# Altium PCB ISA8_Ethernet.PcbDoc (part 1 of 2)
Units mm, origin at the board's own origin, x right, y up, seen from the top; angles counter-clockwise.
Board outline 104.14 x 74.93 mm, 2 copper layers (Front, Back); 34 components, 134 nets, 366 pads, 95 vias.
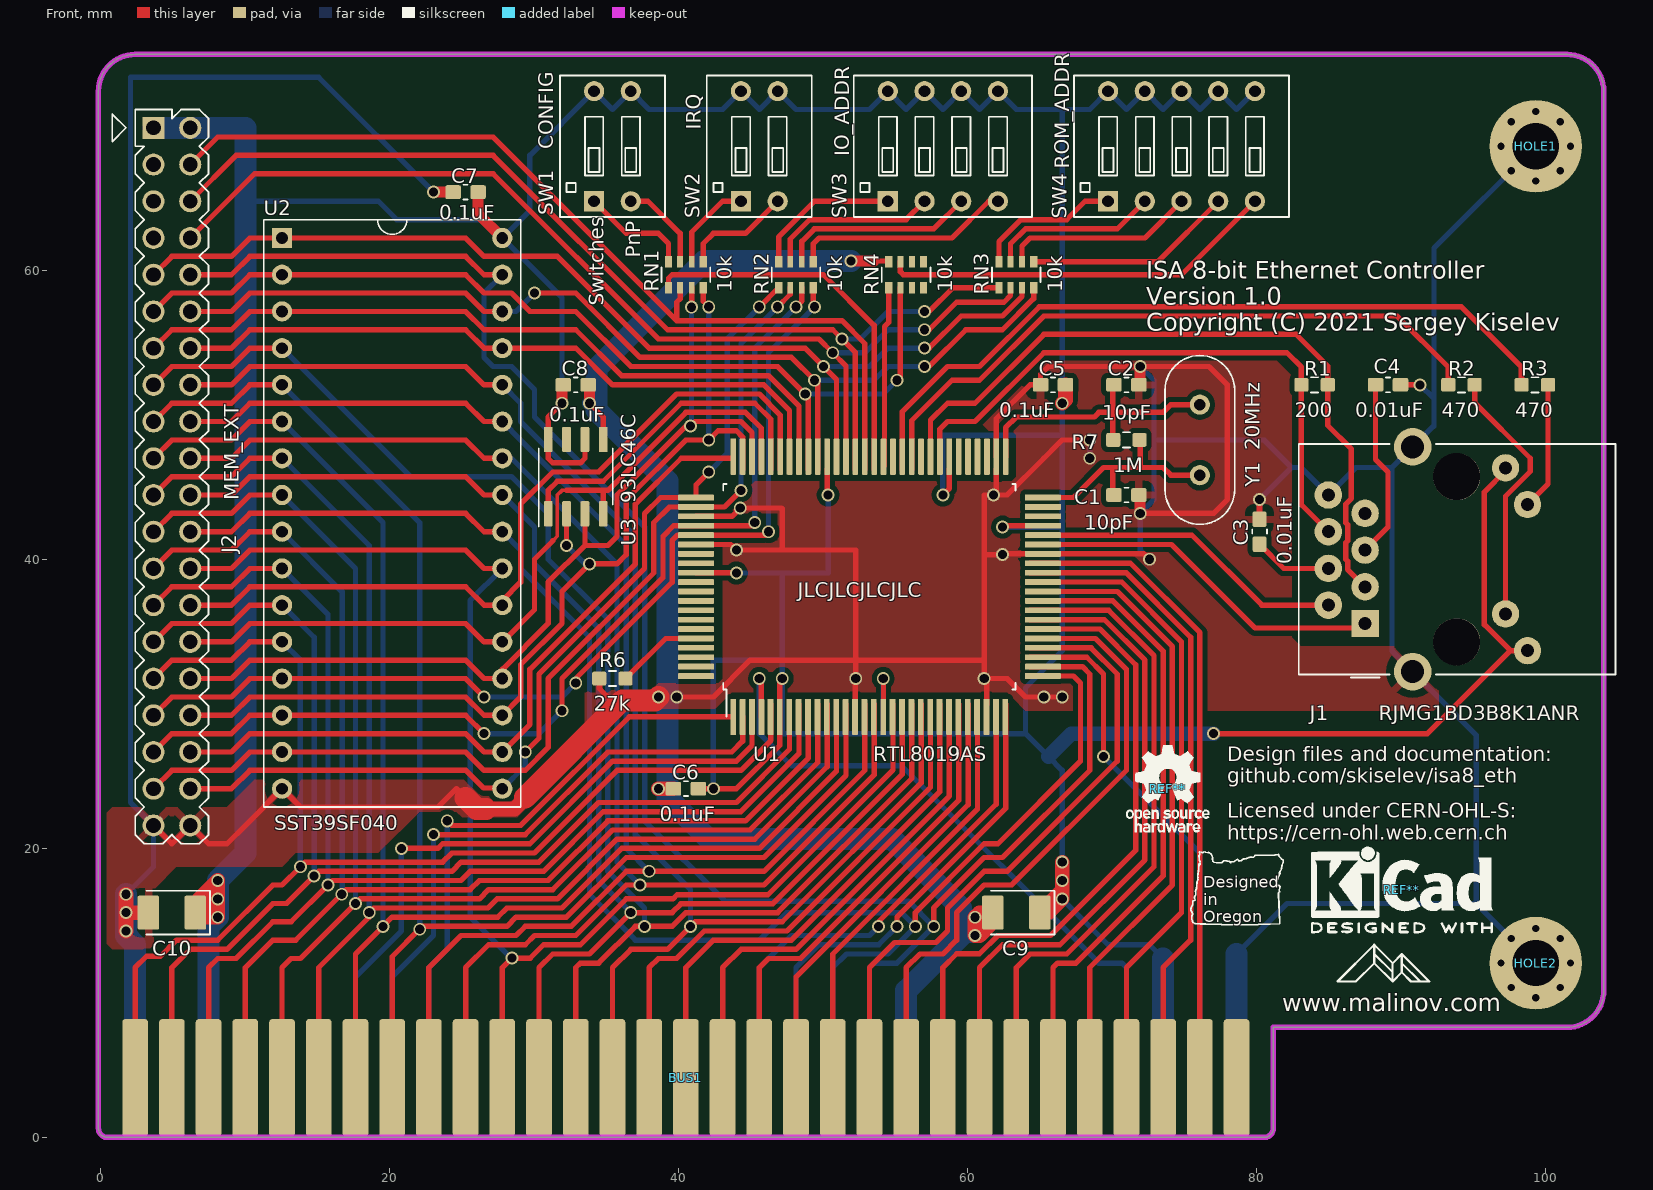
[diagram p0: Front view]
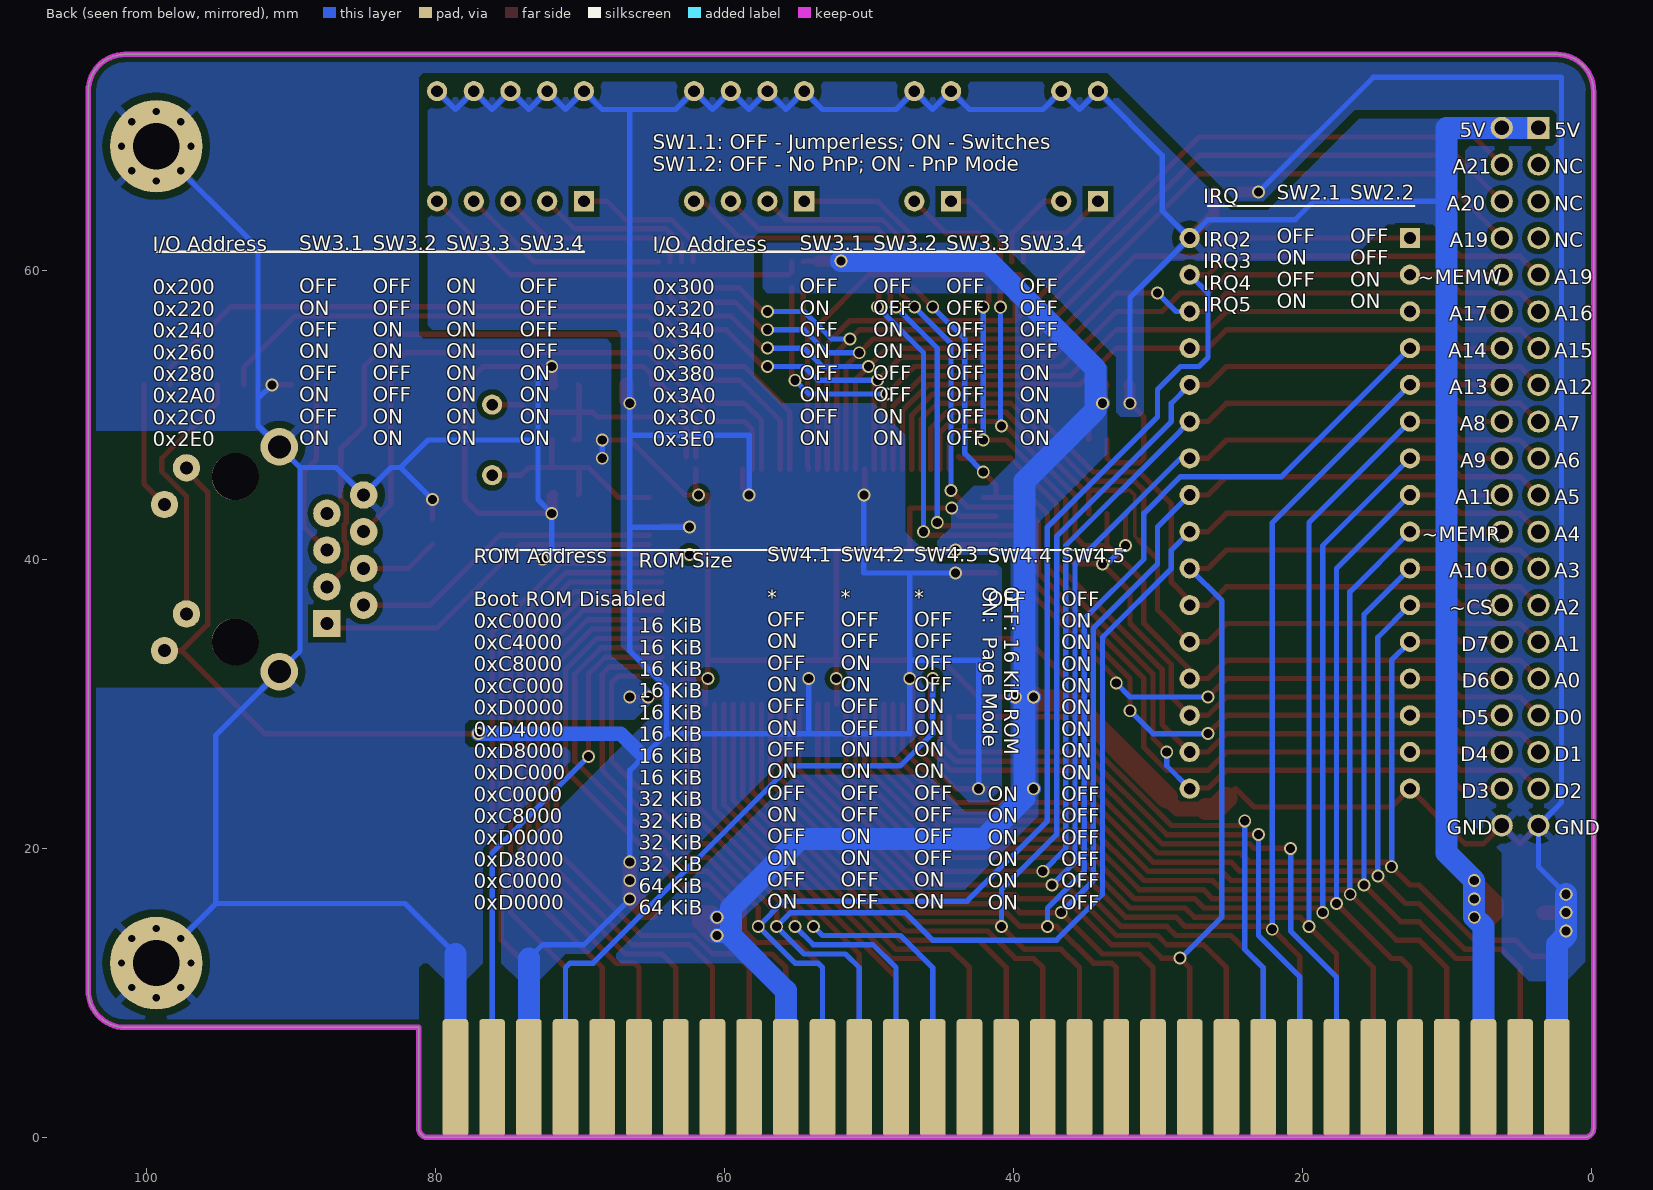
[diagram p1: Back view, seen from below]

## Layer stack, top to bottom
F.Mask: solder mask 0.0102, Solder Resist, Dk 3.5
Front: signal copper 0.0356
Dielectric 1: dielectric 0.32, FR-4, Dk 4.8
Back: signal copper 0.0356
B.Mask: solder mask 0.0102, Solder Resist, Dk 3.5

## Board outline
-0.127,0.635 -0.127,72.39 cw(c2.413,72.39) 2.413,74.93 101.473,74.93 cw(c101.473,72.39) 104.013,72.39 104.013,10.16 cw(c101.473,10.16) 101.473,7.62 81.153,7.62 81.153,0.635 cw(c80.518,0.635) 80.518,0 0.508,0 cw(c0.508,0.635) -0.127,0.635

## Design rules (kind name [scope] priority, off if disabled: settings)
Clearance "Clearence 0.3556_Polygon" [InNamedPolygon('Back-GND') OR InNamedPolygon('Front-GND') OR InNamedPolygon('Back-GND-1') OR InNamedPolygon('Back-VCC') OR InNamedPolygon('Front-GND-1')] p1: gap=0.356 ignorepadtopadclearanceinfootprint=FALSE
Clearance "Clearence 0.254_NetClass" [InNetClass('Power')] p2: gap=0.254 ignorepadtopadclearanceinfootprint=FALSE
Clearance "Clearence 0.2_NetClass" [InNetClass('Default')] p3: gap=0.2 ignorepadtopadclearanceinfootprint=FALSE
HoleSize "Hole Size (Default)" [All] p1: absolutevalues=TRUE maxlimit=10 minlimit=0 maxpercent=80.000 minpercent=20.000
MinimumSolderMaskSliver [All] p1: minsoldermaskwidth=0
PolygonConnect Polygon_Front-GND-1_ConnectDirect [IsNamedPolygon('Front-GND-1') vs IsVia] p1: connectstyle=Direct reliefconductorwidth=0.254 reliefentries=4 polygonreliefangle="90 Angle" airgapwidth=0.254
PolygonConnect Polygon_Front-GND-1_ConnectRelief45 [IsNamedPolygon('Front-GND-1') vs (IsThruPin or IsSMTPin) and (PadShape_AllLayers = 'Round')] p2: connectstyle=Relief reliefconductorwidth=0.508 reliefentries=4 polygonreliefangle="45 Angle" airgapwidth=0.508
PolygonConnect Polygon_Front-GND-1_ConnectRelief90 [IsNamedPolygon('Front-GND-1') vs (IsThruPin or IsSMTPin) and (PadShape_AllLayers <> 'Round')] p3: connectstyle=Relief reliefconductorwidth=0.508 reliefentries=4 polygonreliefangle="90 Angle" airgapwidth=0.508
PolygonConnect Polygon_Back-VCC_ConnectDirect [IsNamedPolygon('Back-VCC') vs IsVia] p4: connectstyle=Direct reliefconductorwidth=0.254 reliefentries=4 polygonreliefangle="90 Angle" airgapwidth=0.254
PolygonConnect Polygon_Back-VCC_ConnectRelief45 [IsNamedPolygon('Back-VCC') vs (IsThruPin or IsSMTPin) and (PadShape_AllLayers = 'Round')] p5: connectstyle=Relief reliefconductorwidth=0.508 reliefentries=4 polygonreliefangle="45 Angle" airgapwidth=0.508
PolygonConnect Polygon_Back-VCC_ConnectRelief90 [IsNamedPolygon('Back-VCC') vs (IsThruPin or IsSMTPin) and (PadShape_AllLayers <> 'Round')] p6: connectstyle=Relief reliefconductorwidth=0.508 reliefentries=4 polygonreliefangle="90 Angle" airgapwidth=0.508
PolygonConnect Polygon_Back-GND-1_ConnectDirect [IsNamedPolygon('Back-GND-1') vs IsVia] p7: connectstyle=Direct reliefconductorwidth=0.254 reliefentries=4 polygonreliefangle="90 Angle" airgapwidth=0.254
PolygonConnect Polygon_Back-GND-1_ConnectRelief45 [IsNamedPolygon('Back-GND-1') vs (IsThruPin or IsSMTPin) and (PadShape_AllLayers = 'Round')] p8: connectstyle=Relief reliefconductorwidth=0.508 reliefentries=4 polygonreliefangle="45 Angle" airgapwidth=0.508
PolygonConnect Polygon_Back-GND-1_ConnectRelief90 [IsNamedPolygon('Back-GND-1') vs (IsThruPin or IsSMTPin) and (PadShape_AllLayers <> 'Round')] p9: connectstyle=Relief reliefconductorwidth=0.508 reliefentries=4 polygonreliefangle="90 Angle" airgapwidth=0.508
PolygonConnect Polygon_Front-GND_ConnectDirect [IsNamedPolygon('Front-GND') vs IsVia] p10: connectstyle=Direct reliefconductorwidth=0.254 reliefentries=4 polygonreliefangle="90 Angle" airgapwidth=0.254
PolygonConnect Polygon_Front-GND_ConnectRelief45 [IsNamedPolygon('Front-GND') vs (IsThruPin or IsSMTPin) and (PadShape_AllLayers = 'Round')] p11: connectstyle=Relief reliefconductorwidth=0.508 reliefentries=4 polygonreliefangle="45 Angle" airgapwidth=0.508
PolygonConnect Polygon_Front-GND_ConnectRelief90 [IsNamedPolygon('Front-GND') vs (IsThruPin or IsSMTPin) and (PadShape_AllLayers <> 'Round')] p12: connectstyle=Relief reliefconductorwidth=0.508 reliefentries=4 polygonreliefangle="90 Angle" airgapwidth=0.508
PolygonConnect Polygon_Back-GND_ConnectDirect [IsNamedPolygon('Back-GND') vs IsVia] p13: connectstyle=Direct reliefconductorwidth=0.254 reliefentries=4 polygonreliefangle="90 Angle" airgapwidth=0.254
PolygonConnect Polygon_Back-GND_ConnectRelief45 [IsNamedPolygon('Back-GND') vs (IsThruPin or IsSMTPin) and (PadShape_AllLayers = 'Round')] p14: connectstyle=Relief reliefconductorwidth=0.508 reliefentries=4 polygonreliefangle="45 Angle" airgapwidth=0.508
PolygonConnect Polygon_Back-GND_ConnectRelief90 [IsNamedPolygon('Back-GND') vs (IsThruPin or IsSMTPin) and (PadShape_AllLayers <> 'Round')] p15: connectstyle=Relief reliefconductorwidth=0.508 reliefentries=4 polygonreliefangle="90 Angle" airgapwidth=0.508
RoutingVias [All] p1: holewidth=0.711 width=1.27 viastyle="Through Hole" minholewidth=0.711 minwidth=1.27 maxholewidth=0.711 maxwidth=1.27
SilkToSilkClearance [All] p1: silktosilkclearance=0
SilkToSolderMaskClearance [IsPad] p1: minsilkscreentomaskgap=0 clearancetoexposedcopper=TRUE
SolderMaskExpansion [All] p1: expansion=0.102 istentingtop=FALSE
Width [All] p1: maxlimit=10 minlimit=0.203 preferedwidth=0.368 minimp=50.000000 maximp=50.000000 favimp=50.000000
26 further rules are at their usual default settings.

## Classes and differential pairs
net class Default: A0 A1 A2 A3 A4 A5 A6 A7 A8 A9 A10 A11 A12 A13 A14 A15 A16 A17 A18 A19 AEN AUI B\C\S\ BA14 BA15 BA16 BA17 BA18 BA19 BA20 BA21 BD0 BD1 BD2 BD3 BD4 BD5 BD6 BD7 D0 D1 D2 D3 D4 D5 D6 D7 EECS GND I\O\C\S\1\6\ I\O\R\ I\O\W\ IOCHRDY IRQ3 IRQ4 IRQ5 IRQ9 JP LED_CRS LED_LINK Net-(BUS1-Pad5) Net-(BUS1-Pad6) Net-(BUS1-Pad7) Net-(BUS1-Pad8) Net-(BUS1-Pad9) Net-(BUS1-Pad15) Net-(BUS1-Pad16) Net-(BUS1-Pad17) Net-(BUS1-Pad18) Net-(BUS1-Pad19) Net-(BUS1-Pad20) Net-(BUS1-Pad21) Net-(BUS1-Pad22) Net-(BUS1-Pad26) Net-(BUS1-Pad27) Net-(BUS1-Pad28) Net-(BUS1-Pad30) Net-(BUS1-Pad32) Net-(C1-Pad2) Net-(C2-Pad2) Net-(C3-Pad1) Net-(C4-Pad1) Net-(J1-PadL2) Net-(J1-PadL3) Net-(J1-PadR7) Net-(J2-Pad3) Net-(J2-Pad5) Net-(J2-Pad7) Net-(RN1-Pad5) Net-(RN1-Pad6) Net-(RN1-Pad7) Net-(RN1-Pad8) Net-(RN2-Pad5) Net-(RN2-Pad6) Net-(RN2-Pad7) Net-(RN2-Pad8) Net-(RN3-Pad5) Net-(RN3-Pad6) Net-(RN3-Pad7) Net-(RN3-Pad8) Net-(RN4-Pad3) Net-(RN4-Pad4) Net-(RN4-Pad5) Net-(RN4-Pad6) Net-(RN4-Pad7) Net-(U1-Pad48) Net-(U1-Pad49) Net-(U1-Pad53) Net-(U1-Pad54) Net-(U1-Pad55) Net-(U1-Pad56) Net-(U1-Pad60) Net-(U1-Pad63) Net-(U1-Pad87) Net-(U1-Pad88) Net-(U1-Pad90) Net-(U1-Pad91) Net-(U1-Pad92) Net-(U1-Pad93) Net-(U1-Pad94) Net-(U1-Pad95) Net-(U1-Pad97) Net-(U1-Pad98) Net-(U1-Pad99) Net-(U1-Pad100) Net-(U3-Pad7) RSTDRV S\M\E\M\R\ S\M\E\M\W\ TP_RX+ TP_RX- TP_TX+ TP_TX- VCC

## Components (designator, comment, footprint, x,y, rotation, side; value= is the part's Value field where it differs from the comment)
BUS1 "BUSPC_DEV" Conn_Edge_PCB_ISA8 40.513,4.127 r0 top
C1 "10pF" C_0603_1608Metric_Pad1.08x0.95mm_HandSolder 70.993,44.45 r180 top
C2 "10pF" C_0603_1608Metric_Pad1.08x0.95mm_HandSolder 70.993,52.07 r180 top
C3 "0.01uF" C_0603_1608Metric_Pad1.08x0.95mm_HandSolder 80.2,41.91 r90 top
C4 "0.01uF" C_0603_1608Metric_Pad1.08x0.95mm_HandSolder 89.09,52.07 r0 top
C5 "0.1uF" C_0603_1608Metric_Pad1.08x0.95mm_HandSolder 65.913,52.07 r180 top
C6 "0.1uF" C_0603_1608Metric_Pad1.08x0.95mm_HandSolder 40.513,24.13 r180 top
C7 "0.1uF" C_0603_1608Metric_Pad1.08x0.95mm_HandSolder 25.273,65.405 r180 top
C8 "0.1uF" C_0603_1608Metric_Pad1.08x0.95mm_HandSolder 32.893,52.07 r0 top
C9 "Comment" CP_EIA-3528-15_AVX-H_Pad1.50x2.35mm_HandSolder 63.373,15.557 r180 top
C10 "Comment" CP_EIA-3528-15_AVX-H_Pad1.50x2.35mm_HandSolder 4.953,15.557 r180 top
HOLE1 "Comment" MountingHole_3.2mm_M3_Pad_Via 99.314,68.58 r0 top
HOLE2 "Comment" MountingHole_3.2mm_M3_Pad_Via 99.314,12.065 r0 top
J1 "RJMG1BD3B8K1ANR" RJ45_Amphenol_RJMG1BD3B8K1ANR 87.503,35.56 r90 top
J2 "MEM_EXT" Conn_Pin_Header_20x2_2.54mm 4.953,45.72 r270 top
R1 "200" R_0603_1608Metric_Pad0.98x0.95mm_HandSolder 84.01,52.07 r180 top
R2 "470" R_0603_1608Metric_Pad0.98x0.95mm_HandSolder 94.17,52.07 r180 top
R3 "470" R_0603_1608Metric_Pad0.98x0.95mm_HandSolder 99.251,52.07 r180 top
R6 "27k" R_0603_1608Metric_Pad0.98x0.95mm_HandSolder 35.433,31.75 r0 top
R7 "1M" R_0603_1608Metric_Pad0.98x0.95mm_HandSolder 70.993,48.26 r180 top
REF** "Comment" KiCad-Logo2_5mm_SilkScreen 90.043,17.145 r0 top
REF** "Comment" OSHW-Logo_5.7x6mm_SilkScreen 73.85,24.13 r0 top
RN1 "10k" R_Array_Convex_4x0603 40.513,59.69 r90 top
RN2 "10k" R_Array_Convex_4x0603 48.133,59.69 r90 top
RN3 "10k" R_Array_Convex_4x0603 63.373,59.69 r90 top
RN4 "10k" R_Array_Convex_4x0603 55.753,59.69 r90 top
SW1 "CONFIG" Switch_DIP_2_Positions 35.433,68.58 r0 top
SW2 "IRQ" Switch_DIP_2_Positions 45.593,68.58 r0 top
SW3 "IO_ADDR" Switch_DIP_4_Positions 58.293,68.58 r0 top
SW4 "ROM_ADDR" Switch_DIP_5_Positions 74.803,68.58 r0 top
U1 "RTL8019AS" IC_PQFP-100_14x20mm_P0.65mm_Hand_Soldering 53.213,38.1 r90 top
U2 "SST39SF040" Socket_DIP32_600 20.193,43.18 r270 top
U3 "93LC46C" SO-8_3.9x4.9mm_P1.27mm 32.893,45.72 r90 top
Y1 "20MHz" Crystal_HC-49U_Vert 76.073,48.26 r90 top

## Footprints (in the part's own frame and the unit in brackets; to place one, negate y for a bottom-side part, rotate by r counter-clockwise, add the part's x,y. Pads: shape width x height; smd on the part's side, far side on the other; paste and mask are expansions set on the pad)
C_0603_1608Metric_Pad1.08x0.95mm_HandSolder [mm]
  rrect25% 1.075x0.95 smd mask+0: 1(-0.863,0) 2(0.863,0)
  silkscreen extent -0.15,-0.51 0.15,0.51
Conn_Edge_PCB_ISA8 [mil]
  rrect25% 70x320 smd far side paste-320 mask+0: 1(1500,0) 2(1400,0) 3(1300,0) 4(1200,0) 5(1100,0) 6(1000,0) 7(900,0) 8(800,0) 9(700,0) 10(600,0) 11(500,0) 12(400,0) 13(300,0) 14(200,0) 15(100,0) 16(0,0) 17(-100,0) 18(-200,0) 19(-300,0) 20(-400,0) 21(-500,0) 22(-600,0) 23(-700,0) 24(-800,0) 25(-900,0) 26(-1000,0) 27(-1100,0) 28(-1200,0) 29(-1300,0) 30(-1400,0) 31(-1500,0)
  rrect25% 70x320 smd paste-320 mask+0: 32(1500,0) 33(1400,0) 34(1300,0) 35(1200,0) 36(1100,0) 37(1000,0) 38(900,0) 39(800,0) 40(700,0) 41(600,0) 42(500,0) 43(400,0) 44(300,0) 45(200,0) 46(100,0) 47(0,0) 48(-100,0) 49(-200,0) 50(-300,0) 51(-400,0) 52(-500,0) 53(-600,0) 54(-700,0) 55(-800,0) 56(-900,0) 57(-1000,0) 58(-1100,0) 59(-1200,0) 60(-1300,0) 61(-1400,0) 62(-1500,0)
Conn_Pin_Header_20x2_2.54mm [mil]
  rect 60x60 hole 40 paste-60 mask+0: 1(-950,-50)
  round 60 hole 40 paste-60 mask+0: 2(-950,50) 3(-850,-50) 4(-850,50) 5(-750,-50) 6(-750,50) 7(-650,-50) 8(-650,50) 9(-550,-50) 10(-550,50) 11(-450,-50) 12(-450,50) 13(-350,-50) 14(-350,50) 15(-250,-50) 16(-250,50) 17(-150,-50) 18(-150,50) 19(-50,-50) 20(-50,50) 21(50,-50) 22(50,50) 23(150,-50) 24(150,50) 25(250,-50) 26(250,50) 27(350,-50) 28(350,50) 29(450,-50) 30(450,50) 31(550,-50) 32(550,50) 33(650,-50) 34(650,50) 35(750,-50) 36(750,50) 37(850,-50) 38(850,50) 39(950,-50) 40(950,50)
  silkscreen extent -1000,-100 1000,100
CP_EIA-3528-15_AVX-H_Pad1.50x2.35mm_HandSolder [mm]
  rrect17% 1.5x2.35 smd mask+0: 1(-1.625,0) 2(1.625,0)
  silkscreen extent -2.64,-1.51 1.75,1.51
Crystal_HC-49U_Vert [mil]
  round 55 hole 32 paste-55 mask+0: 1(-96.1,0) 2(96.1,0)
  silkscreen extent -230,-95 230,95
IC_PQFP-100_14x20mm_P0.65mm_Hand_Soldering [mm]
  rrect25% 2.5x0.4 smd mask+0: 1(-9,9.425) 2(-9,8.775) 3(-9,8.125) 4(-9,7.475) 5(-9,6.85) 6(-9,6.2) 7(-9,5.55) 8(-9,4.9) 9(-9,4.25) 10(-9,3.6) 11(-9,2.95) 12(-9,2.3) 13(-9,1.65) 14(-9,1) 15(-9,0.35) 16(-9,-0.3) 17(-9,-0.95) 18(-9,-1.6) 19(-9,-2.25) 20(-9,-2.9) 21(-9,-3.55) 22(-9,-4.2) 23(-9,-4.85) 24(-9,-5.5) 25(-9,-6.15) 26(-9,-6.8) 27(-9,-7.45) 28(-9,-8.1) 29(-9,-8.75) 30(-9,-9.4) 51(9,-9.425) 52(9,-8.775) 53(9,-8.125) 54(9,-7.475) 55(9,-6.825) 56(9,-6.175) 57(9,-5.525) 58(9,-4.875) 59(9,-4.225) 60(9,-3.575) 61(9,-2.925) 62(9,-2.275) 63(9,-1.625) 64(9,-0.975) 65(9,-0.325) 66(9,0.325) 67(9,0.975) 68(9,1.625) 69(9,2.275) 70(9,2.925) 71(9,3.575) 72(9,4.225) 73(9,4.875) 74(9,5.525) 75(9,6.175) 76(9,6.825) 77(9,7.475) 78(9,8.125) 79(9,8.775) 80(9,9.425)
  rrect25% 0.4x2.5 smd mask+0: 31(-6.175,-12) 32(-5.525,-12) 33(-4.875,-12) 34(-4.225,-12) 35(-3.575,-12) 36(-2.925,-12) 37(-2.275,-12) 38(-1.625,-12) 39(-0.975,-12) 40(-0.325,-12) 41(0.325,-12) 42(0.975,-12) 43(1.625,-12) 44(2.275,-12) 45(2.925,-12) 46(3.575,-12) 47(4.225,-12) 48(4.875,-12) 49(5.525,-12) 50(6.175,-12) 81(6.175,12) 82(5.525,12) 83(4.875,12) 84(4.225,12) 85(3.575,12) 86(2.925,12) 87(2.275,12) 88(1.625,12) 89(0.975,12) 90(0.325,12) 91(-0.325,12) 92(-0.975,12) 93(-1.625,12) 94(-2.275,12) 95(-2.925,12) 96(-3.575,12) 97(-4.225,12) 98(-4.875,12) 99(-5.525,12) 100(-6.175,12)
  silkscreen extent -9,-10.11 7.11,10.11
KiCad-Logo2_5mm_SilkScreen [mm]
  silkscreen extent -6.28,-3 6.29,2.98
MountingHole_3.2mm_M3_Pad_Via [mm]
  round 0.8 hole 0.5 paste-0.8 mask+0: 1(-2.4,0) 1(-1.697,-1.697) 1(-1.697,1.697) 1(0,-2.4) 1(0,2.4) 1(1.697,-1.697) 1(1.697,1.697) 1(2.4,0)
  round 6.4 hole 3.2 paste-6.4 mask+0: 1(0,0)
OSHW-Logo_5.7x6mm_SilkScreen [mm]
  silkscreen extent -2.87,-3.02 2.88,3.01
R_0603_1608Metric_Pad0.98x0.95mm_HandSolder [mm]
  rrect25% 0.975x0.95 smd mask+0: 1(-0.913,0) 2(0.913,0)
  silkscreen extent -0.25,-0.52 0.25,0.52
R_Array_Convex_4x0603 [mm]
  rect 0.8x0.5 smd mask+0: 1(-0.9,1.2) 4(-0.9,-1.2) 5(0.9,-1.2) 8(0.9,1.2)
  rect 0.8x0.4 smd mask+0: 2(-0.9,0.4) 3(-0.9,-0.4) 6(0.9,-0.4) 7(0.9,0.4)
  silkscreen extent -0.5,-1.68 0.5,1.68
RJ45_Amphenol_RJMG1BD3B8K1ANR [mm]
  round 2.6 hole 1.6 paste-2.6 mask+0: 13(-3.33,-3.29) 13(12.22,-3.29)
  round 1.89 hole 0.89 paste-1.89 mask+0: L1(10.77,-9.72) L2(8.23,-11.24) L3(0.66,-9.72) L4(-1.88,-11.24)
  rect 1.9x1.9 hole 0.9 paste-1.9 mask+0: R1(0,0)
  round 1.9 hole 0.9 paste-1.9 mask+0: R2(1.27,2.54) R3(2.54,0) R4(3.81,2.54) R5(5.08,0) R6(6.35,2.54) R7(7.62,0) R8(8.89,2.54)
  round 3.25 hole 3.25 paste-3.25 mask+0: Un1(-1.27,-6.34) Un2(10.16,-6.34)
  silkscreen extent -3.73,-17.33 12.42,4.59
SO-8_3.9x4.9mm_P1.27mm [mm]
  rrect25% 1.75x0.6 smd mask+0: 1(-2.575,1.905) 2(-2.575,0.635) 3(-2.575,-0.635) 4(-2.575,-1.905) 5(2.575,-1.905) 6(2.575,-0.635) 7(2.575,0.635) 8(2.575,1.905)
  silkscreen extent -3.45,-2.56 1.95,2.56
Socket_DIP32_600 [mil]
  rect 55x55 hole 32 paste-55 mask+0: 1(-750,-300)
  round 55 hole 32 paste-55 mask+0: 2(-650,-300) 3(-550,-300) 4(-450,-300) 5(-350,-300) 6(-250,-300) 7(-150,-300) 8(-50,-300) 9(50,-300) 10(150,-300) 11(250,-300) 12(350,-300) 13(450,-300) 14(550,-300) 15(650,-300) 16(750,-300) 17(750,300) 18(650,300) 19(550,300) 20(450,300) 21(350,300) 22(250,300) 23(150,300) 24(50,300) 25(-50,300) 26(-150,300) 27(-250,300) 28(-350,300) 29(-450,300) 30(-550,300) 31(-650,300) 32(-750,300)
  silkscreen extent -800,-350 800,350
Switch_DIP_2_Positions [mil]
  rect 55x55 hole 32 paste-55 mask+0: 1(-50,-150)
  round 55 hole 32 paste-55 mask+0: 2(50,-150) 3(50,150) 4(-50,150)
  silkscreen extent -143,-193 143,193
Switch_DIP_4_Positions [mil]
  rect 55x55 hole 32 paste-55 mask+0: 1(-150,-150)
  round 55 hole 32 paste-55 mask+0: 2(-50,-150) 3(50,-150) 4(150,-150) 5(150,150) 6(50,150) 7(-50,150) 8(-150,150)
  silkscreen extent -243,-193 243,193
Switch_DIP_5_Positions [mil]
  rect 55x55 hole 32 paste-55 mask+0: 1(-200,-150)
  round 55 hole 32 paste-55 mask+0: 2(-100,-150) 3(0,-150) 4(100,-150) 5(200,-150) 6(200,150) 7(100,150) 8(0,150) 9(-100,150) 10(-200,150)
  silkscreen extent -293,-193 293,193

## Part data
BUS1: library part Conn_Edge_PCB_ISA8, "Connector, PCB Edge, ISA8"
C1 C2 C3 C4 C5 C6 C7 C8: library part C_0603_1608Metric_Pad1.08x0.95mm_HandSolder, "Capacitor SMD 0603 (1608 Metric), square (rectangular) end terminal, IPC_7351 nominal with elongated pad for handsoldering. (Body size source: IPC-SM-782 page 76, https://www.pcb-3d.com/wordpress/wp-content/uploads/ipc-sm-782a_amendment_1_and_2.pdf), generated with kicad-footprint-generator"
C9 C10: library part CP_EIA-3528-15_AVX-H_Pad1.50x2.35mm_HandSolder, "Tantalum Capacitor SMD AVX-H (3528-15 Metric), IPC_7351 nominal, (Body size from: http://www.kemet.com/Lists/ProductCatalog/Attachments/253/KEM_TC101_STD.pdf), generated with kicad-footprint-generator"
HOLE1 HOLE2: library part MountingHole_3.2mm_M3_Pad_Via, "Mounting Hole 3.2mm, M3"
J1: library part RJ45_Amphenol_RJMG1BD3B8K1ANR, "1 Port RJ45 Magjack Connector Through Hole 10/100 Base-T, AutoMDIX, https://www.amphenolcanada.com/ProductSearch/Drawings/AC/RJMG1BD3B8K1ANR.PDF"
J2: library part Conn_Pin_Header_20x2_2.54mm, "Pin Header, 20x2, 2.54mm pitch"
R1 R2 R3 R6 R7: library part R_0603_1608Metric_Pad0.98x0.95mm_HandSolder, "Resistor SMD 0603 (1608 Metric), square (rectangular) end terminal, IPC_7351 nominal with elongated pad for handsoldering. (Body size source: IPC-SM-782 page 72, https://www.pcb-3d.com/wordpress/wp-content/uploads/ipc-sm-782a_amendment_1_and_2.pdf), generated with kicad-footprint-generator"
REF**: library part KiCad-Logo2_5mm_SilkScreen, "KiCad Logo"
REF**: library part OSHW-Logo_5.7x6mm_SilkScreen, "Open Source Hardware Logo"
RN1 RN2 RN3 RN4: library part R_Array_Convex_4x0603, "Chip Resistor Network, ROHM MNR14 (see mnr_g.pdf)"
SW1 SW2: library part Switch_DIP_2_Positions, "DIP Switch, 2 Positions"
SW3: library part Switch_DIP_4_Positions, "DIP Switch, 4 Positions"
SW4: library part Switch_DIP_5_Positions, "DIP Switch, 5 Positions"
U1: library part IC_PQFP-100_14x20mm_P0.65mm_Hand_Soldering, "PQFP, 100 Pin (http://www.microsemi.com/index.php?option=com_docman&task=doc_download&gid=131095), generated with kicad-footprint-generator ipc_gullwing_generator.py"
U2: library part Socket_DIP32_600, "32 pins DIL package, round pads"
U3: library part SO-8_3.9x4.9mm_P1.27mm, "SO, 8 Pin (https://www.nxp.com/docs/en/data-sheet/PCF8523.pdf), generated with kicad-footprint-generator ipc_gullwing_generator.py"
Y1: library part Crystal_HC-49U_Vert, "Quartz Crystal, HC-49U, Vertical"

## Via types
v1: diameter 0.889, hole 0.635, Front to Back, tented both sides, 95 vias

## Nets (pads, with @x,y where several pads share a name; then routed paths per layer and width w, separated by ;. In a path a pad name is that pad's centre, name@x,y a point inside that pad or via, vN(x,y) a via of type N, cw(c..) or ccw(c..) an arc to the next point about the centre after c; other vN are vias at no path point)
A0: BUS1.62 J2.31 U1.5 U2.12 | length 86.6
  Front w0.368: BUS1.62@2.413,4.127 2.413,11.747 3.207,12.541 4.159,12.541 5.271,13.652 8.128,13.652 11.938,17.462 12.573,17.462 v1(13.843,18.732) 14.16,19.05 23.685,19.05 24.32,19.685 30.035,19.685 35.75,25.4 44.323,25.4 46.388,27.465 U1.5@46.388,29.975 ; J2.31@3.683,31.75 4.953,33.02 9.08,33.02 10.351,34.29 U2.12@12.573,34.29
  Back w0.368: U2.12@12.573,34.29 13.843,33.02 v1(13.843,18.732)
A1: BUS1.61 J2.29 U1.7 U2.11 | length 89.3
  Front w0.368: J2.29@3.683,34.29 4.953,35.56 9.08,35.56 10.351,36.83 U2.11@12.573,36.83 ; BUS1.61@4.953,4.127 4.953,11.747 6.223,13.018 8.763,13.018 11.938,16.192 12.89,16.192 v1(14.795,18.098) 15.113,18.415 24.32,18.415 24.956,19.05 30.353,19.05 34.48,23.177 44.005,23.177 47.688,26.86 U1.7@47.688,29.975
  Back w0.368: U2.11@12.573,36.83 14.795,34.608 v1(14.795,18.098)
A2: BUS1.60 J2.27 U1.8 U2.10 | length 91.2
  Front w0.368: J2.27@3.683,36.83 4.953,38.1 9.08,38.1 10.351,39.37 U2.10@12.573,39.37 ; BUS1.60@7.493,4.127 7.493,11.747 8.128,12.383 9.398,12.383 11.938,14.922 13.208,14.922 v1(15.748,17.462) 16.066,17.78 24.956,17.78 25.59,18.415 30.67,18.415 34.798,22.543 44.323,22.543 48.338,26.558 U1.8@48.338,29.975
  Back w0.368: U2.10@12.573,39.37 15.748,36.195 v1(15.748,17.462)
A3: BUS1.59 J2.25 U1.9 U2.9 | length 93.1
  Front w0.368: J2.25@3.683,39.37 4.953,40.64 9.08,40.64 10.351,41.91 U2.9@12.573,41.91 ; BUS1.59@10.033,4.127 10.033,11.747 11.938,13.652 13.525,13.652 v1(16.7,16.828) 17.018,17.145 25.59,17.145 26.226,17.78 30.988,17.78 35.115,21.907 44.64,21.907 48.988,26.255 U1.9@48.988,29.975
  Back w0.368: U2.9@12.573,41.91 16.735,37.748 16.735,16.862 v1(16.7,16.828)
A4: BUS1.58 J2.23 U1.10 U2.8 | length 94.9
  Front w0.368: J2.23@3.683,41.91 4.953,43.18 9.08,43.18 10.351,44.45 U2.8@12.573,44.45 ; BUS1.58@12.573,4.127 12.573,11.747 13.208,12.383 13.843,12.383 v1(17.653,16.192) 17.97,16.51 26.226,16.51 26.86,17.145 31.305,17.145 35.433,21.273 44.958,21.273 49.638,25.953 U1.10@49.638,29.975
  Back w0.368: U2.8@12.573,44.45 17.653,39.37 v1(17.653,16.192)
A5: BUS1.57 J2.21 U1.11 U2.7 | length 96.9
  Front w0.368: J2.21@3.683,44.45 4.953,45.72 9.08,45.72 10.351,46.99 U2.7@12.573,46.99 ; BUS1.57@15.113,4.127 15.113,11.747 18.605,15.24 v1(18.605,15.557) 18.923,15.875 26.821,15.875 27.456,16.51 31.623,16.51 35.75,20.637 45.276,20.637 50.288,25.65 U1.11@50.288,29.975
  Back w0.368: U2.7@12.573,46.99 18.605,40.957 v1(18.605,15.557)
A6: BUS1.56 J2.19 U1.12 U2.6 | length 99.5
  Front w0.368: J2.19@3.683,46.99 4.953,48.26 9.08,48.26 10.351,49.53 U2.6@12.573,49.53 ; BUS1.56@17.653,4.127 17.653,12.7 v1(19.558,14.605) 20.193,15.24 27.495,15.24 28.13,15.875 31.941,15.875 36.068,20.002 45.593,20.002 50.938,25.348 U1.12@50.938,29.975
  Back w0.368: U2.6@12.573,49.53 19.558,42.545 v1(19.558,14.605)
A7: BUS1.55 J2.17 U1.13 U2.5 | length 101.4
  Front w0.368: J2.17@3.683,49.53 4.953,50.8 9.08,50.8 10.351,52.07 U2.5@12.573,52.07 ; BUS1.55@20.193,4.127 20.193,12.506 v1(22.098,14.411) 22.292,14.605 28.13,14.605 28.765,15.24 32.258,15.24 36.386,19.367 45.91,19.367 51.588,25.045 U1.13@51.588,29.975
  Back w0.368: U2.5@12.573,52.07 22.098,42.545 v1(22.098,14.411)
A8: BUS1.54 J2.18 U1.15 U2.27 | length 106
  Front w0.368: J2.18@6.223,49.53 9.08,49.53 10.351,50.8 25.273,50.8 26.543,49.53 U2.27@27.813,49.53 ; BUS1.54@22.733,4.127 22.733,11.747 24.956,13.97 28.765,13.97 29.4,14.605 32.575,14.605 36.386,18.415 v1(37.973,18.415) 45.91,18.415 52.888,25.392 U1.15@52.888,29.975
  Back w0.368: U2.27@27.813,49.53 29.083,48.26 36.386,40.957 36.386,20.002 v1(37.973,18.415)
A9: BUS1.53 J2.20 U1.16 U2.26 | length 102.8
  Front w0.368: J2.20@6.223,46.99 9.08,46.99 10.351,48.26 25.273,48.26 26.543,46.99 U2.26@27.813,46.99 ; BUS1.53@25.273,4.127 25.273,11.747 26.86,13.335 29.4,13.335 30.035,13.97 32.893,13.97 36.386,17.462 v1(37.338,17.462) 45.91,17.462 53.538,25.09 U1.16@53.538,29.975
  Back w0.368: U2.26@27.813,46.99 28.448,46.99 35.75,39.688 35.75,19.05 v1(37.338,17.462)
A10: BUS1.52 J2.26 U1.18 U2.23 | length 96.6
  Front w0.368: J2.26@6.223,39.37 9.08,39.37 10.351,40.64 25.273,40.64 26.543,39.37 U2.23@27.813,39.37 ; BUS1.52@27.813,4.127 27.813,11.748 v1(28.473,12.408) 29.743,12.408 30.67,13.335 33.21,13.335 36.386,16.51 39.624,16.51 39.91,16.796 46.196,16.796 54.838,25.438 U1.18@54.838,29.975
  Back w0.368: U2.23@27.813,39.37 25.59,37.148 25.59,15.24 28.423,12.408 v1(28.473,12.408)
A11: BUS1.51 J2.22 U1.19 U2.25 | length 98.4
  Front w0.368: J2.22@6.223,44.45 9.08,44.45 10.351,45.72 25.273,45.72 26.543,44.45 U2.25@27.813,44.45 ; BUS1.51@30.353,4.127 30.353,11.747 31.305,12.7 33.846,12.7 v1(36.703,15.557) 39.56,15.557 40.164,16.161 46.514,16.161 55.488,25.135 U1.19@55.488,29.975
  Back w0.368: U2.25@27.813,44.45 30.035,42.227 30.035,39.688 34.48,35.242 34.48,17.78 v1(36.703,15.557)
A12: BUS1.50 J2.15 U1.20 U2.4 | length 105.9
  Front w0.368: J2.15@3.683,52.07 4.953,53.34 9.08,53.34 10.351,54.61 U2.4@12.573,54.61 ; BUS1.50@32.893,4.127 32.893,11.747 33.21,12.065 34.48,12.065 37.02,14.605 v1(37.655,14.605) 39.56,14.605 40.513,15.557 46.863,15.557 56.138,24.833 U1.20@56.138,29.975
  Back w0.368: U2.4@12.573,54.61 21.463,45.72 28.448,45.72 30.988,43.18 30.988,40.005 35.115,35.877 35.115,18.415 37.655,15.875 v1(37.655,14.605)
A13: BUS1.49 J2.16 U1.21 U2.28 | length 105.2
  Front w0.368: J2.16@6.223,52.07 9.08,52.07 10.351,53.34 25.273,53.34 26.543,52.07 U2.28@27.813,52.07 ; BUS1.49@35.433,4.127 35.433,11.747 36.703,13.018 39.243,13.018 v1(40.831,14.605) 41.148,14.922 47.18,14.922 56.788,24.53 U1.21@56.788,29.975
  Back w0.368: U2.28@27.813,52.07 29.083,50.8 29.083,49.53 37.02,41.593 37.02,20.955 40.831,17.145 v1(40.831,14.605)
A14: BUS1.48 U1.22 | length 38
  Front w0.368: BUS1.48@37.973,4.127 37.973,11.747 38.608,12.383 39.878,12.383 41.783,14.287 47.498,14.287 57.438,24.228 U1.22@57.438,29.975
A15: BUS1.47 U1.23 | length 36.3
  Front w0.368: BUS1.47@40.513,4.127 40.513,11.747 42.418,13.652 47.816,13.652 58.088,23.925 U1.23@58.088,29.975
A16: BUS1.46 U1.24 | length 34.6
  Front w0.368: BUS1.46@43.053,4.127 43.053,11.747 44.323,13.018 48.133,13.018 58.738,23.623 U1.24@58.738,29.975
A17: BUS1.45 U1.25 | length 32.9
  Front w0.368: BUS1.45@45.593,4.127 45.593,11.747 46.228,12.383 48.45,12.383 59.388,23.32 U1.25@59.388,29.975
A18: BUS1.44 U1.26 | length 30.8
  Front w0.368: BUS1.44@48.133,4.127 48.133,11.112 60.038,23.018 U1.26@60.038,29.975
A19: BUS1.43 U1.27 | length 30
  Front w0.368: BUS1.43@50.673,4.127 50.673,12.7 60.688,22.715 60.688,29.1 U1.27@60.688,29.975
AEN: BUS1.42 U1.34 | length 44.4
  Front w0.368: BUS1.42@53.213,4.127 53.213,11.747 54.959,13.494 57.817,13.494 58.61,14.287 58.61,15.875 61.151,18.415 62.738,18.415 70.358,26.035 70.358,32.067 68.551,33.875 U1.34@64.338,33.875
AUI: RN4.1 U1.64 | length 12.7
  Front w0.368: U1.64@54.188,46.225 54.188,46.377 54.254,46.443 54.254,56.109 54.553,56.408 RN4.1@54.553,58.79
B\C\S\: J2.28 U1.75 U2.22 | length 55.6
  Front w0.368: J2.28@6.223,36.83 9.08,36.83 10.351,38.1 25.273,38.1 26.543,36.83 U2.22@27.813,36.83 27.813,37.148 29.083,38.417 29.083,43.815 31.305,46.038 34.48,46.038 39.878,51.435 45.593,51.435 47.038,49.99 U1.75@47.038,46.225
BA14: J2.14 U1.74 U2.29 | length 48.4
  Front w0.368: J2.14@6.223,54.61 9.08,54.61 10.351,55.88 25.273,55.88 26.543,54.61 U2.29@27.813,54.61 32.893,54.61 35.433,52.07 45.91,52.07 47.688,50.293 U1.74@47.688,46.225
BA15: J2.13 U1.73 U2.3 | length 52.8
  Front w0.368: J2.13@3.683,54.61 4.953,55.88 9.08,55.88 10.351,57.15 U2.3@12.573,57.15 25.273,57.15 26.543,55.88 32.893,55.88 36.068,52.705 46.228,52.705 48.338,50.595 U1.73@48.338,46.225
BA16: J2.11 RN4.2 U1.72 U2.2 | length 68.1
  Front w0.368: J2.11@3.683,57.15 4.953,58.42 9.08,58.42 10.351,59.69 U2.2@12.573,59.69 25.273,59.69 26.543,58.42 28.448,58.42 29.718,57.15 32.893,57.15 36.703,53.34 46.863,53.34 v1(48.768,51.435) 48.988,51.215 U1.72@48.988,46.225 ; v1(55.118,52.388) 55.353,52.623 RN4.2@55.353,58.79
  Back w0.368: v1(48.768,51.435) 54.165,51.435 v1(55.118,52.388)
BA17: J2.12 RN3.4 U1.71 U2.30 | length 71.8
  Front w0.368: J2.12@6.223,57.15 9.08,57.15 10.351,58.42 25.273,58.42 26.543,57.15 U2.30@27.813,57.15 ; v1(30.035,58.42) 32.893,58.42 37.338,53.975 47.816,53.975 v1(49.403,52.387) 49.638,52.152 U1.71@49.638,46.225 ; v1(57.023,53.34) 57.34,53.34 59.88,55.88 62.42,55.88 64.573,58.033 RN3.4@64.573,58.79
  Back w0.368: U2.30@27.813,57.15 28.765,57.15 v1(30.035,58.42) ; v1(49.403,52.387) 53.53,52.387 54.483,53.34 v1(57.023,53.34)
BA18: J2.9 RN3.3 U1.69 U2.1 | length 74.9
  Front w0.368: J2.9@3.683,59.69 4.953,60.96 9.08,60.96 10.351,62.23 U2.1@12.573,62.23 25.273,62.23 26.543,60.96 31.623,60.96 37.973,54.61 48.768,54.61 v1(50.038,53.34) 50.938,52.44 U1.69@50.938,46.225 ; v1(57.023,54.61) 57.34,54.61 59.563,56.832 62.42,56.832 63.773,58.185 RN3.3@63.773,58.79
  Back w0.368: v1(50.038,53.34) 53.213,53.34 54.483,54.61 v1(57.023,54.61)
BA19: J2.8 RN3.2 U1.68 | length 74.3
  Front w0.368: J2.8@6.223,62.23 10.668,66.675 27.178,66.675 38.608,55.245 49.721,55.245 v1(50.673,54.292) 51.588,53.378 U1.68@51.588,46.225 ; v1(57.023,55.88) 57.34,55.88 59.245,57.785 62.509,57.785 62.973,58.249 RN3.2@62.973,58.79
  Back w0.368: v1(50.673,54.292) 52.895,54.292 54.483,55.88 v1(57.023,55.88)
BA20: J2.6 RN3.1 U1.67 | length 73.4
  Front w0.368: J2.6@6.223,64.77 9.398,67.945 27.178,67.945 39.243,55.88 50.673,55.88 v1(51.308,55.245) 52.238,54.315 U1.67@52.238,46.225 ; v1(57.023,57.15) 57.34,57.15 58.98,58.79 RN3.1@62.173,58.79
  Back w0.368: v1(51.308,55.245) 52.578,55.245 54.483,57.15 v1(57.023,57.15)
BA21: J2.4 RN1.2 U1.66 | length 64.5
  Front w0.368: J2.4@6.223,67.31 8.128,69.215 27.178,69.215 39.878,56.515 ; RN1.2@40.113,58.79 40.113,58.02 39.878,57.785 39.878,56.515 ; U1.66@52.888,46.225 52.888,54.935 51.308,56.515 48.133,56.515 39.878,56.515
BD0: J2.33 RN2.4 U1.85 U2.13 | length 69
  Front w0.368: J2.33@3.683,29.21 4.953,30.48 9.08,30.48 10.351,31.75 U2.13@12.573,31.75 25.273,31.75 v1(26.543,30.48) ; v1(32.893,31.432) 32.893,31.744 39.56,38.411 39.56,41.307 39.928,41.675 U1.85@41.213,41.675 45.993,41.675 v1(46.228,41.91) ; RN2.4@49.333,58.79 49.333,57.537 v1(49.403,57.468)
  Back w0.368: v1(26.543,30.48) 31.941,30.48 v1(32.893,31.432) ; v1(46.228,41.91) 46.228,54.292 v1(49.403,57.468)
BD1: J2.35 RN2.3 U1.84 U2.14 | length 69.8
  Front w0.368: J2.35@3.683,26.67 4.953,27.94 9.08,27.94 10.351,29.21 U2.14@12.573,29.21 25.273,29.21 v1(26.543,27.94) ; v1(31.941,29.527) 31.941,31.75 38.925,38.735 38.925,41.593 39.658,42.325 39.78,42.325 U1.84@41.213,42.325 45.056,42.325 v1(45.276,42.545) ; v1(48.133,57.468) 48.533,57.867 RN2.3@48.533,58.79
  Back w0.368: v1(26.543,27.94) 30.353,27.94 v1(31.941,29.527) ; v1(45.276,42.545) 45.276,54.61 v1(48.133,57.468)
BD2: J2.37 RN2.2 U1.82 U2.15 | length 71.4
  Front w0.368: J2.37@3.683,24.13 4.953,25.4 8.763,25.4 9.08,25.4 10.351,26.67 U2.15@12.573,26.67 25.273,26.67 26.543,25.4 29.4,25.4 30.988,26.987 30.988,31.75 38.291,39.052 38.291,42.545 39.37,43.625 U1.82@42.088,43.625 ; U1.82@41.213,43.625 43.18,43.625 v1(44.323,44.768) ; v1(46.863,57.468) 47.733,58.338 RN2.2@47.733,58.79
  Back w0.368: v1(44.323,44.768) 44.323,54.927 v1(46.863,57.468)
BD3: J2.38 RN2.1 U1.81 U2.17 | length 68.4
  Front w0.368: J2.38@6.223,24.13 9.08,24.13 10.351,25.4 25.295,25.4 26.521,24.174 27.769,24.174 U2.17@27.813,24.13 ; v1(29.4,26.67) 30.353,27.622 30.353,32.067 37.655,39.37 37.655,43.158 38.772,44.275 U1.81@41.213,44.275 41.213,45.15 v1(42.1,46.038) ; U1.81@40.371,44.275 U1.81@42.088,44.275 ; v1(45.593,57.468) 46.915,58.79 RN2.1@46.933,58.79
  Back w0.368: U2.17@27.813,24.13 29.4,25.717 v1(29.4,26.67) ; v1(42.1,46.038) 43.37,47.307 43.37,55.245 v1(45.593,57.468)
BD4: J2.36 U1.80 U2.18 | length 51.7
  Front w0.368: J2.36@6.223,26.67 9.08,26.67 10.351,27.94 25.273,27.94 26.543,26.67 U2.18@27.813,26.67 29.718,28.575 29.718,32.385 37.02,39.688 37.02,43.815 40.195,46.99 43.678,46.99 U1.80@43.788,47.1
BD5: J2.34 RN1.4 U1.79 U2.19 U3.2 | length 69.7
  Front w0.368: J2.34@6.223,29.21 9.08,29.21 10.351,30.48 25.273,30.48 26.543,29.21 U2.19@27.813,29.21 29.083,30.48 29.083,32.703 31.941,35.56 31.941,37.782 v1(33.846,39.688) 35.75,39.688 36.386,40.322 36.386,44.133 40.513,48.26 v1(42.1,48.26) 42.735,48.895 44.005,48.895 44.438,48.462 U1.79@44.438,46.225 ; v1(32.258,40.957) U3.2@32.258,43.145 ; RN1.4@41.713,58.79 41.713,57.855 v1(42.1,57.468)
  Back w0.368: v1(32.258,40.957) 33.528,39.688 v1(33.846,39.688) ; v1(42.1,48.26) 42.1,48.578 v1(42.1,57.468)